# Altium PCB hat_template 2020V3.PcbDoc (part 2 of 2)
Units mm, origin at the board's own origin, x right, y up, seen from the top; angles counter-clockwise.
Board outline 64 x 85 mm, 4 copper layers (Top Side, Ground Plane, Power Plane, Bottom Side), stack 0.844 mm thick; 139 components, 78 nets, 419 pads, 123 vias.
Unrouted connection lines stored in the file: 3.
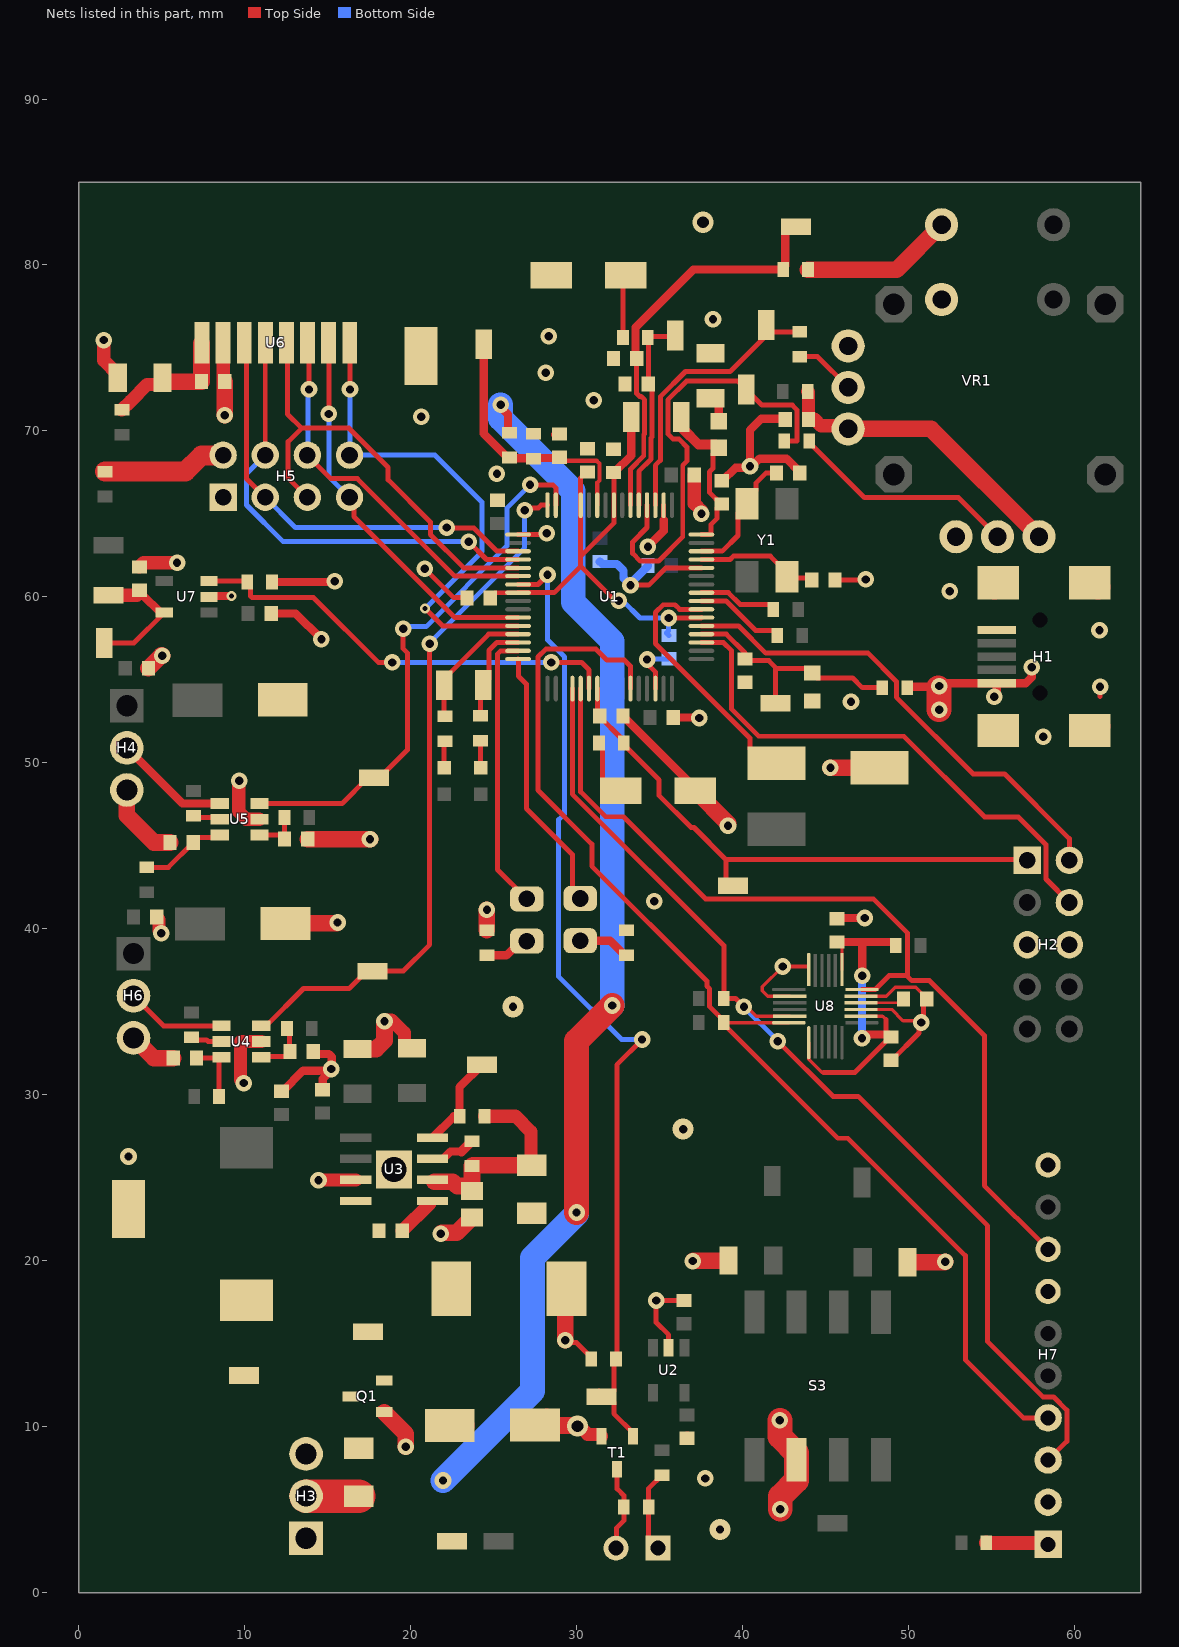
[diagram p4: the nets of this part, all layers, seen from the top]

## Via types
v1: diameter 1, hole 0.5, Top Side to Bottom Side, 103 vias
v2: diameter 1, hole 0.5, Top Side to Bottom Side, tented top, 9 vias
v3: diameter 1.27, hole 0.5, Top Side to Bottom Side, 3 vias
v4: diameter 1.27, hole 0.711, Top Side to Bottom Side, 2 vias
v5: diameter 0.6, hole 0.3, Top Side to Bottom Side, 2 vias
v6: diameter 0.6, hole 0.3, Top Side to Bottom Side, tented both sides, 1 vias
v7: diameter 1, hole 0.5, Top Side to Bottom Side, tented both sides, 1 vias
v8: diameter 1.3, hole 1.1, Top Side to Bottom Side, 1 vias
v9: diameter 2, hole 1.5, Top Side to Bottom Side, 1 vias

## Nets (pads, with @x,y where several pads share a name; then routed paths per layer and width w, separated by ;. In a path a pad name is that pad's centre, name@x,y a point inside that pad or via, vN(x,y) a via of type N, cw(c..) or ccw(c..) an arc to the next point about the centre after c; other vN are vias at no path point) (continued)
GND: BUCK_GND.1 C1.1 C2.1 C3.1 C4.1 C5.1 C6.2 C7.1 C8.2 C9.1 C10.2 C11.1 C12.2 C13.1 C15.2 C16.1 C18.1 C19.1 C20.1 C21.1 C22.1 C23.1 C24.1 C25.1 C26.1 C27.1 C28.1 C29.1 C30.1 C31.1 C32.1 C33.1 C34.1 C35.1 C36.2 C37.2 C38.1 C39.1 C40.1 C41.1 C42.1 C43.1 C44.1 C45.1 D1.1 GND_RADIO.1 GND_SAM4S.1 H1.5 H1.6 H1.7 H1.8 H1.9 H2.5 H2.6 H3.1 H3.3 H4.3 H5.1 H6.3 H7.2 H7.7 H7.10 Q1.1 R2.1 R7.1 R10.1 R11.1 R12.2 R13.2 R30.1 S1.1 S2.1 T1.2 U1.2 U1.17 U1.46 U1.60 U2.2 U3.7 U3.EPAD U4.2 U5.2 U6.2 U7.2 U8.9 U8.11 U8.18 U8.20 VR1.3 VR1.6 VR1.7 | length 154.9
  Top Side w0.2: v1(42.425,37.725) 41.2,36.5 41.2,36.25 41.515,35.935 U8.20@42.843,35.935 ; U8.9@47.143,35.135 48.986,35.135 49.671,34.45 v1@50.675,34.45 ; U8.11@47.143,35.935 48.657,35.935 49.196,36.475 50.45,36.475 51.1,35.825 C38.1@51.1,35.775
  Top Side w0.25: v1(42.425,37.725) 43.925,37.725 U8.18@43.95,37.7
  Top Side w0.3: C27.1@4.7,40.7 C27.1@4.841,40.559 ; v1@4.841,39.861 v1(4.975,39.727) ; U7.2@7.85,60 U7.2@7.9,60.05 ; C35.1@8.704,73.071 C35.1@8.8,72.975 ; v2@9.65,48.9 v2(9.675,48.925) ; v1(14.45,24.85) v1@14.465,24.865 ; v1@15.175,31.425 15.225,31.475 v1(15.225,31.55) ; v1@15.375,60.9 v1(15.425,60.95) ; v1@15.547,40.322 v1(15.6,40.375) ; v1(18.425,34.425) 18.425,34.375 v1@18.55,34.5 ; v1@20.625,70.875 v1(20.65,70.85) ; v1(20.851,61.703) 22.579,59.975 23.4,59.975 C10.2@23.4,59.925 ; v2(21.825,21.625) v2@21.875,21.675 ; U1.17@26.475,63.75 28.125,63.75 v2(28.2,63.825) ; v1@28.15,73.275 v1(28.15,73.513) ; v1(29.325,15.2) 29.459,15.066 29.984,15.066 30.875,14.175 R30.1@30.875,14.075 ; D1.1@29.325,18.225 D1.1@29.4,18.3 ; C6.2@32.175,68.9 C6.2@32.225,68.9 ; v1(33.252,60.703) 34.347,60.703 35.394,61.75 U1.60@37.525,61.75 ; v7(34.25,56.225) 34.25,55.986 34.75,55.486 U1.46@34.75,54.475 ; 35.25,64.49 U1.2@35.25,65.525 ; U2.2@35.55,14.75 35.55,15.525 34.8,16.275 v1(34.8,17.598) 34.802,17.6 C1.1@36.475,17.6 ; v1(37,19.975) v1@37.025,20 ; 37.142,65.572 37.142,65.575 ; v1@37.375,52.725 v1(37.4,52.7) ; v2(37.525,65) v2@37.525,65.189 ; v1(39.125,46.2) v1@39.125,46.35 ; C4.1@45.575,61.025 47.4,61.025 v1(47.425,61.05) ; C36.2@45.7,40.6 C36.2@45.725,40.575 ; C37.2@48.95,32.075 49,32.075 50.641,33.716 50.641,34.216 v1(50.775,34.35) ; v1@50.675,34.45 50.686,34.45 50.909,34.673 50.909,35.584 C38.1@51.1,35.775 ; v1(61.513,57.988) v1@61.55,58.025 ; 61.55,54 v1(61.55,54.575)
  Top Side w0.5: U7.2@7.9,60.05 v5(9.2,60.05) ; C26.1@11.6,59 13.075,59 v1(14.625,57.45) ; R11.1@11.65,60.9 v1@15.375,60.9 ; C23.1@12.225,30.2 12.275,30.2 13.525,31.45 14.475,31.45 14.479,31.454 15.146,31.454 15.175,31.425 14.7,30.95 C24.1@14.7,30.3 ; C28.1@14.125,32.6 14.271,32.454 15.071,32.454 15.25,32.275 15.25,31.575 v1(15.225,31.55) ; C25.1@28.7,69.79 28.725,69.765 C25.1@28.831,69.782 ; C43.1@32.8,52.825 37.15,48.475 S1.1@37.15,48.325 ; v1(34.3,63.025) 35.25,63.975 35.25,64.633 ; C9.1@35.975,52.725 v1@37.375,52.725 ; C15.2@38.75,67 38.8,67 39.579,67.779 40.354,67.779 v1(40.45,67.875) ; C20.1@42.575,70.7 42.55,70.725 41.125,70.725 40.45,70.05 v1(40.45,67.875) ; C3.1@43.45,67.475 43.45,67.525 42.65,68.325 41.035,68.325 40.585,67.875 v1(40.45,67.875) ; C36.2@45.725,40.575 45.8,40.65 v1(47.375,40.65)
  Top Side w0.75: v1(25.2,67.425) v1@25.212,67.413 ; C7.1@25.212,65.837 C7.1@25.225,65.825
  Top Side w0.8: v1(1.5,75.475) 1.5,74.25 2.35,73.4 C39.1@2.35,73.2 ; C34.1@3.65,61.8 3.9,62.05 v2(5.925,62.05) ; v1@4.841,39.861 C27.1@4.841,40.559 ; C35.1@8.704,73.071 U6.2@8.704,75.325 ; v2@9.65,48.9 9.65,47.05 10.1,46.6 U5.2@10.9,46.6 ; v2(9.95,30.7) 9.75,30.9 9.75,33.2 U4.2@11,33.2 ; v1@14.465,24.865 U3.7@16.689,24.865 ; v1@18.55,34.5 18.855,34.5 19.625,33.73 19.625,32.95 19.775,32.8 C18.1@20.075,32.8 ; C45.1@27.5,10.1 27.725,10.1 C45.1@28.213,10.588 ; v4(30.05,10.025) 30.177,10.025 30.677,9.525 31.4,9.525 T1.2@31.5,9.425 ; C33.1@36.65,9.3 C33.1@36.689,9.3 ; C13.1@37.1,67.35 37.1,65.617 37.142,65.575 ; 37.142,65.572 v2@37.525,65.189 ; R2.1@44.2,53.725 R2.1@44.219,53.706 ; v1@46.519,53.706 v1(46.537,53.688)
  Top Side w1: H4.3@2.9,48.36 2.9,46.825 4.525,45.2 C29.1@5.5,45.2 ; H6.3@3.3,33.42 4.52,32.2 C41.1@5.7,32.2 ; C22.1@4.2,55.7 4.98,56.48 4.998,56.48 v2(5.025,56.453) ; v1(8.8,70.95) C35.1@8.8,72.975 ; C2.1@12.461,40.322 v1@15.547,40.322 ; C40.1@13.8,45.4 v1(17.55,45.4) ; C19.1@16.8,32.75 17.925,32.75 18.425,33.25 v1@18.425,34.375 ; Q1.1@18.4,10.875 19.7,9.575 v1(19.7,8.788) ; v2@21.875,21.675 22.775,21.675 C16.1@23.7,22.6 ; R12.2@24.6,39.9 v1(24.6,41.15) ; C45.1@28.213,10.588 28.213,10.35 28.5,10.063 30.012,10.063 v4(30.05,10.025) ; v1(29.325,15.2) D1.1@29.325,18.225 ; v1@37.025,20 C32.1@39.15,20 ; S1.1@37.15,48.325 v1@39.125,46.35 ; R7.1@38.075,74.675 38.15,74.675 R7.1@38.225,74.75 ; v1(45.3,49.7) GND_SAM4S.1@48.25,49.7 ; C31.1@49.95,19.9 52.2,19.9 v1(52.225,19.925)
  Top Side w1.5: H1.8@55.175,51.7 H1.8@55.425,51.95 ; H1.6@55.175,60.6 H1.6@55.425,60.85 ; H1.9@60.925,51.95 61.175,51.95 H1.9@61.425,52.2 ; H1.7@60.925,60.85 61.175,60.85 H1.7@61.425,60.6
  Bottom Side w0.3: v1@4.925,39.675 4.925,39.677 v1(4.975,39.727) ; v2(5.025,56.453) v2@5.203,56.453 ; v7(34.25,56.225) 34.275,56.25 35.55,56.25 C12.2@35.575,56.275
  Bottom Side w0.5: C5.1@31.4,62.125 31.55,61.975 32.425,61.975 32.825,61.575 32.825,61.13 v1(33.252,60.703) 33.252,60.802 34.3,61.85 C11.1@34.3,61.9
  other v1: 37.75,6.875 3,26.275 34.675,41.65 58.125,51.575 52.498,60.34 31.029,71.842 28.325,75.7
  other v2: 38.225,76.725
  other v3: 38.65,3.8 36.425,27.925 26.175,35.3
  other v4: 37.625,82.575
  other v9: 19,25.5
IMU_INT: H7.8 U1.37 U8.12 | length 55.7
  Top Side w0.3: U1.37@30.25,54.475 30.25,48.251 31.751,46.75 32.825,46.75 37.775,41.8 47.881,41.8 49.95,39.731 49.95,37.222 49.903,37.175 ; U8.12@47.193,36.335 47.993,36.335 48.833,37.175 49.903,37.175 ; H7.8@58.417,20.684 54.578,24.522 54.578,33.571 51.274,36.875 50.203,36.875 49.903,37.175
LED_TAPE_3V3_A: TAPE_A.1 U1.16 U4.3 | length 42.2
  Top Side w0.3: U4.3@11,34.15 11.3,34.15 13.55,36.4 16.3,36.4 17.35,37.45 TAPE_A.1@17.7,37.45 19.561,37.45 21.15,39.039 v1(21.15,57.175) ; v1(26.875,65.225) 27.009,65.359 27.699,65.359 27.865,65.525 U1.16@28.25,65.525
  Bottom Side w0.3: v1(21.15,57.175) 21.15,57.24 26.875,62.965 v1(26.875,65.225)
LED_TAPE_3V3_B: TAPE_B.1 U1.15 U5.3 | length 32.9
  Top Side w0.3: U5.3@10.9,47.55 15.875,47.55 17.425,49.1 TAPE_B.1@17.8,49.1 18.125,49.1 19.8,50.775 19.8,56.627 19.55,56.877 v1(19.55,58.075) ; v1(27.2,66.75) 28.575,66.75 28.75,66.575 U1.15@28.75,65.525
  Bottom Side w0.3: v1(19.55,58.075) 19.684,58.209 20.934,58.209 25.8,63.075 25.8,65.35 v1(27.2,66.75)
LED_TAPE_5V_A: H6.2 U4.4 | length 6
  Top Side w0.3: H6.2@3.3,35.96 5.11,34.15 U4.4@8.6,34.15
LED_TAPE_5V_B: H4.2 U5.4 | length 7
  Top Side w0.5: H4.2@2.9,50.9 6.25,47.55 U5.4@8.5,47.55
MISO: H5.7 U1.27 U6.7 | length 23.6
  Top Side w0.3: U6.7@15.061,75.325 15.1,75.286 15.075,75.261 v1(15.075,71.025) ; H5.7@16.32,66 16.578,65.742 16.578,64.844 22.673,58.75 U1.27@26.475,58.75
  Bottom Side w0.3: v1(15.075,71.025) 15.075,67.245 H5.7@16.32,66
MOSI: H5.6 U1.22 U6.6 | length 22.7
  Top Side w0.3: H5.6@13.78,68.54 15.195,67.125 16.786,67.125 22.661,61.25 U1.22@26.475,61.25 ; U6.6@13.789,75.325 13.675,75.211 13.875,75.011 v1(13.875,72.5)
  Bottom Side w0.3: H5.6@13.78,68.54 13.827,68.587 13.827,72.453 v1(13.875,72.5)
Net3V3_RADIO_1: 3V3_RADIO.1 C34.2 L3.1 U7.5 | length 8.2
  Top Side w0.3: 3V3_RADIO.1@1.55,57.225 3.325,57.225 U7.5@5.15,59.05 ; C34.2@3.65,60.4 C34.2@3.7,60.4
  Top Side w0.5: C34.2@3.675,60.4 3.7,60.4 3.85,60.25 3.85,60.125 4.925,59.05 U7.5@5.15,59.05
  Top Side w0.8: L3.1@1.8,60.1 C34.2@3.5,60.1
Net5V_BUCK_RAW_1: 5V_BUCK_RAW.1 C17.2 D1.2 L2.1 U3.8 | length 0.2
  Top Side w0.8: L2.1@9.95,17.45 L2.1@10.1,17.6
NetBUZZER_1: BUZZER.1 R30.2 T1.1 U1.23 | length 60.1
  Top Side w0.3: U1.23@26.475,60.75 27.675,60.75 v1(28.25,61.325) ; BUZZER.1@31.35,12.15 31.35,11.8 BUZZER.1@31.5,11.8 ; R30.2@32.375,14.025 32.425,14.075 32.425,31.8 v1(33.95,33.325) ; R30.2@32.375,14.075 32.25,13.95 32.25,12.15 BUZZER.1@31.9,11.8 ; T1.1@33.4,9.425 33.4,9.625 32.25,10.775 32.25,11.45 BUZZER.1@31.9,11.8 ; BUZZER.1@31.5,11.8 BUZZER.1@31.9,11.8 ; BUZZER.1@31.5,11.8 BUZZER.1@31.9,11.8
  Bottom Side w0.3: v1(28.25,61.325) 28.25,57.406 29.275,56.381 29.275,46.923 28.925,46.573 28.925,37.115 32.715,33.325 v1(33.95,33.325)
NetC3_2: C3.2 U1.62 Y1.3 | length 7.7
  Top Side w0.3: U1.62@37.525,62.75 38.775,62.75 39.725,63.7 39.725,65.05 Y1.3@40.275,65.6 40.275,65.85 40.825,66.4 40.825,66.875 41.425,67.475 C3.2@42.05,67.475
NetC4_2: C4.2 U1.61 Y1.1 | length 7.5
  Top Side w0.3: U1.61@37.525,62.25 39.251,62.25 39.451,62.45 41.675,62.45 42.675,61.45 Y1.1@42.675,61.2 42.75,61.125 44.075,61.125 C4.2@44.175,61.025
NetC6_1: C6.1 C8.1 C10.1 C12.1 L1.2 U1.8 U1.12 U1.24 U1.54 | length 31.5
  Top Side w0.25: C10.1@24.8,59.925 24.8,59.975 25.075,60.25 U1.24@26.475,60.25
  Top Side w0.3: U1.24@26.475,60.25 27.675,60.25 28.65,60.25 30.25,61.85 ; C8.1@30.65,67.525 30.6,67.525 30.25,67.175 U1.12@30.25,65.525 30.25,62.444 ; C6.1@32.225,67.5 32.25,67.475 U1.8@32.25,65.525 32.25,64.444 30.25,62.444 ; v1(32.55,59.775) 32.325,59.775 30.25,61.85 ; v1(35.55,58.725) 35.562,58.738 37.513,58.738 U1.54@37.525,58.75 ; 30.25,61.85 30.25,62.444
  Top Side w0.5: C6.1@32.3,67.5 32.3,67.525 33.3,68.525 L1.2@33.3,70.85
  Bottom Side w0.3: v1(32.55,59.775) 32.775,59.775 33.825,58.725 v1(35.55,58.725) 35.55,57.95 35.425,57.825 C12.1@35.575,57.675
NetC14_1: C14.1 R7.2 | length 1.9
  Top Side w0.3: C14.1@38.575,70.575 C14.1@38.7,70.7
  Top Side w0.5: R7.2@38.075,71.975 38.275,71.975 38.575,71.675 38.575,70.7 C14.1@38.638,70.637
NetC14_2: C14.2 C15.1 L1.1 U1.64 | length 9.8
  Top Side w0.3: U1.64@37.525,63.75 38.088,63.75 38.113,63.775 38.113,64.375 38.45,64.713 38.45,65.35 C15.1@38.7,65.6 ; C14.2@38.375,68.775 38.225,68.625 38.225,67.749 38,67.524 38,66.3 C15.1@38.7,65.6 ; C15.1@38.75,65.6 C15.1@38.7,65.6
  Top Side w0.6: L1.1@36.3,70.85 36.3,70.225 36.425,70.1 36.43,70.1 37.355,69.175 38.375,69.175 C14.2@38.575,68.975
NetC16_2: C16.2 F2.2 R8.2 R29.2 U3.2 | length 13
  Top Side w0.3: U3.2@21.311,24.865 U3.2@21.415,24.761 ; C16.2@23.4,24.5 C16.2@23.7,24.2 ; R29.2@23.7,25.7 R29.2@23.75,25.75 ; F2.2@27.25,25.8 F2.2@27.3,25.75
  Top Side w0.8: R8.2@24.45,28.7 26.325,28.7 27.25,27.775 F2.2@27.25,25.8
  Top Side w1: U3.2@21.415,24.761 22.539,24.761 22.8,24.5 C16.2@23.4,24.5 ; C16.2@23.7,24.2 R29.2@23.7,25.7 ; R29.2@23.75,25.75 F2.2@27.3,25.75
NetC17_1: C17.1 U3.1 | length 2.6
  Top Side w0.3: U3.1@21.158,23.442 U3.1@21.311,23.595
  Top Side w0.8: C17.1@19.5,21.8 21.142,23.442 U3.1@21.158,23.442
NetC20_2: C20.2 R23.1 VR1.1 VR1.4 | length 18.5
  Top Side w0.8: R23.1@43.925,72.375 43.975,72.325 C20.2@43.975,70.7 44.344,70.7 44.728,70.316 VR1.4@46.179,70.316
  Top Side w1: VR1.4@46.179,70.316 VR1.4@46.37,70.125 51.37,70.125 VR1.1@57.87,63.625
NetC28_2: C28.2 R27.2 U4.1 | length 3.3
  Top Side w0.3: U4.1@11,32.25 11.05,32.3 12.475,32.3 12.725,32.55 C28.2@12.725,32.6 ; R27.2@12.55,34 12.7,33.85 C28.2@12.7,32.7
NetC29_2: C29.2 R16.1 U5.6 | length 5.2
  Top Side w0.3: R16.1@4.1,43.7 5.4,43.7 C29.2@6.9,45.2 6.9,45.25 7.15,45.5 8.35,45.5 U5.6@8.5,45.65
NetC35_2: C35.2 C39.2 R19.1 U6.1 | length 8.9
  Top Side w0.3: C39.2@4.65,72.8 C39.2@5.05,73.2 C39.2@5.275,72.975 ; U6.1@7.4,75.293 U6.1@7.432,75.325 U6.1@7.432,74.525
  Top Side w0.8: R19.1@2.6,71.275 3.125,71.8 3.128,71.8 4.128,72.8 C39.2@4.65,72.8
  Top Side w1: C39.2@5.275,72.975 C35.2@7.4,72.975 7.4,74.525 U6.1@7.4,75.293
NetC36_1: C36.1 C37.1 R17.1 U8.1 U8.8 U8.13 | length 22.4
  Top Side w0.2: U8.1@43.993,33.135 43.993,32.132 44.774,31.35 44.875,31.35 ; C36.1@45.7,39.2 45.993,38.907 U8.13@45.993,37.535 ; U8.8@47.143,34.735 48.44,34.735 48.65,34.525
  Top Side w0.3: 44.875,31.35 46.775,31.35 C37.1@48.8,33.375 ; v1(47.2,33.4) v1@47.425,33.625 ; C37.1@48.65,33.725 48.65,34.525
  Top Side w0.5: C36.1@45.7,39.2 47.175,39.2 ; v1(47.225,37.175) 47.225,39.15 47.175,39.2 ; v1@47.425,33.625 C37.1@48.675,33.625 ; C37.1@48.8,33.625 C37.1@48.95,33.475 ; R17.1@49.225,39 49.225,39.1 49.125,39.2 48.125,39.2 47.175,39.2
  Bottom Side w0.3: v1@47.2,37.15 v1(47.225,37.175)
  Bottom Side w0.5: v1(47.2,33.4) v1@47.2,37.15
NetC38_2: C38.2 U8.10 | length 2.7
  Top Side w0.15: U8.10@47.143,35.535 49.46,35.535 C38.2@49.7,35.775
NetC40_2: C40.2 R15.2 U5.1 | length 2.9
  Top Side w0.3: U5.1@10.9,45.65 12.15,45.65 C40.2@12.4,45.4 R15.2@12.4,46.7
NetC41_2: C41.2 R28.1 U4.6 | length 3.8
  Top Side w0.3: C41.2@7.1,32.2 8.55,32.2 8.45,32.1 R28.1@8.45,29.9
NetC42_2: C42.2 JOY_SEL.1 R26.1 U1.6 | length 24.8
  Top Side w0.3: U1.6@33.25,65.525 33.25,67.697 34.05,68.497 34.05,69.776 34.1,69.826 34.1,71.874 33.899,72.075 33.801,72.075 33.625,72.251 C42.2@33.625,74.375 ; R26.1@42.45,79.725 R26.1@42.45,79.825
  Top Side w0.5: C42.2@33.625,74.375 33.55,74.45 33.55,76.241 37.034,79.725 42.35,79.725 42.575,79.95 42.575,82.05 JOY_SEL.1@43.025,82.5
NetDL1_1: DL1.1 R6.2 | length 1.6
  Top Side w0.3: R6.2@24.2,51.325 24.225,51.3 DL1.1@24.225,49.7
NetDL2_1: DL2.1 R5.2 | length 1.6
  Top Side w0.3: DL2.1@22.025,49.7 22.025,51.25 R5.2@22.075,51.3
NetERASE_1: ERASE.1 U1.55 | length 15.6
  Top Side w0.3: U1.55@37.525,59.25 36.209,59.25 35.934,59.525 35.219,59.525 34.75,59.056 34.75,57.189 40.45,51.489 40.45,50.825 41.3,49.975 ERASE.1@42.05,49.975
NetF1_1: F1.1 H3.2 | length 3.2
  Top Side w2: H3.2@13.7,5.81 13.706,5.804 16.871,5.804 F1.1@16.875,5.8
NetH5_2: H5.2 R34.1 | length 7.5
  Top Side w0.6: H5.2@8.685,68.525 H5.2@8.7,68.54
  Top Side w1.2: R34.1@1.575,67.55 6.425,67.55 7.4,68.525 H5.2@8.685,68.525
NetH7_1: H7.1 R35.1 | length 3.8
  Top Side w0.87: R35.1@54.7,3 54.715,2.985 58.335,2.985 H7.1@58.417,2.904
NetH8_1: H8.1 R20.2 R31.2 | length 5.1
  Top Side w0.3: R20.2@34.416,5.099 R20.2@34.35,5.165 ; H8.1@34.915,2.675 34.35,3.24 R20.2@34.35,5.15 R20.2@34.35,5.165 ; R31.2@35.15,7.075 34.35,6.275 R20.2@34.35,5.165
NetH8_2: H8.2 R20.1 T1.3 | length 5
  Top Side w0.3: H8.2@32.375,2.837 32.4,2.862 32.4,3.875 32.85,4.325 R20.1@32.85,5.15 32.85,5.85 32.45,6.25 T1.3@32.45,7.425
NetJ1_1: J1.1 U1.31 | length 16.8
  Top Side w0.3: U1.31@26.475,56.75 25.425,56.75 25.225,56.55 25.225,43.575 J1.1@27,41.8
NetJ1_2: J1.2 R12.1 | length 2.8
  Top Side w0.3: J1.2@26.628,39.256 J1.2@27,39.256
  Top Side w0.5: R12.1@24.6,38.4 25.772,38.4 J1.2@26.628,39.256
NetJ2_1: J2.1 U1.32 | length 16
  Top Side w0.3: U1.32@26.475,56.25 26.5,56.225 26.5,55.225 26.975,54.75 26.975,47.25 29.75,44.475 29.75,42.3 J2.1@30.225,41.825
NetJ2_2: J2.2 R13.1 | length 3.2
  Top Side w0.3: R13.1@32.95,38.35 R13.1@33,38.4
  Top Side w0.5: J2.2@30.225,39.281 32.019,39.281 R13.1@32.95,38.35
NetJOYSTICK1_1: JOYSTICK1.1 R24.1 U1.4 | length 27.8
  Top Side w0.3: U1.4@34.25,65.525 34.25,64.181 33.377,63.308 33.377,62.622 33.845,62.153 34.939,62.153 36.4,63.614 36.4,67.924 36.65,68.174 36.65,69.031 36.181,69.5 35.826,69.5 35.5,69.826 35.5,71.874 36.626,73 39.725,73 JOYSTICK1.1@40.225,72.5 41.176,71.549 43.001,71.549 43.275,71.274 43.275,69.4 R24.1@42.525,69.4 R24.1@42.525,69.5
NetJOYSTICK2_1: JOYSTICK2.1 R25.2 U1.3 | length 17.2
  Top Side w0.3: U1.3@34.75,65.525 34.75,67.924 35.05,68.224 35.05,72.061 36.57,73.58 39.255,73.58 41.237,75.563 41.237,75.788 JOYSTICK2.1@41.425,75.975 ; JOYSTICK2.1@41.425,76.375 41.425,76.1 JOYSTICK2.1@41.425,75.975 ; R25.2@43.45,75.975 JOYSTICK2.1@41.425,75.975
NetPGOOD_1: PGOOD.1 R8.1 U3.4 | length 5.8
  Top Side w0.5: U3.4@21.311,27.405 22.606,28.7 R8.1@22.95,28.7 22.95,30.45 PGOOD.1@24.3,31.8
NetR3_2: R3.2 U1.57 | length 4.8
  Top Side w0.2: R3.2@41.825,59.225 R3.2@41.85,59.25
  Top Side w0.3: U1.57@37.525,60.25 39.151,60.25 39.851,59.55 41.65,59.55 41.838,59.362 R3.2@41.838,59.237
NetR4_2: R4.2 U1.56 | length 5.5
  Top Side w0.3: U1.56@37.525,59.75 39.014,59.75 40.789,57.975 41.9,57.975 42.1,57.775 R4.2@42.1,57.675
NetR11_2: R11.2 U1.38 U7.3 | length 26.8
  Top Side w0.3: U7.3@7.85,60.95 10.1,60.95 R11.2@10.15,60.9 10.35,60.7 10.35,60.05 10.45,59.95 14.15,59.95 18.05,56.05 v1(18.9,56.05) ; v1(28.475,56.05) 30.3,56.05 30.75,55.6 U1.38@30.75,54.475
  Bottom Side w0.3: v1@18.675,56.05 v1(18.9,56.05) v1(28.475,56.05)
NetR14_2: R14.2 S1.2 | length 3.6
  Top Side w0.3: R14.2@31.35,51.2 31.55,51 31.55,49.061 32.286,48.325 S1.2@32.65,48.325
NetR18_2: R18.2 S2.2 | length 3.8
  Top Side w0.3: R18.2@32.8,75.625 32.8,79.2 S2.2@32.975,79.375
NetR24_2: R24.2 VR1.2 | length 13.8
  Top Side w0.3: R24.2@44.025,69.4 44.025,69.3 47.35,65.975 53.02,65.975 VR1.2@55.37,63.625
NetR25_1: R25.1 VR1.5 | length 3.7
  Top Side w0.3: R25.1@43.45,74.475 44.52,74.475 VR1.5@46.37,72.625
NetR26_2: R26.2 VR1.8 | length 9.2
  Top Side w1: R26.2@43.95,79.725 49.3,79.725 VR1.8@52,82.425
NetR29_1: R29.1 U3.3 | length 2.8
  Top Side w0.3: U3.3@21.311,26.135 U3.3@21.96,26.135
  Top Side w0.5: U3.3@21.96,26.135 22.4,26.575 23.075,26.575
  Top Side w0.6: 23.075,26.575 R29.1@23.7,27.2
NetR32_1: R32.1 U4.5 | length 1.9
  Top Side w0.3: R32.1@6.8,33.45 6.95,33.3 7.7,33.3 7.8,33.2 U4.5@8.6,33.2
NetR33_1: R33.1 U5.5 | length 1.7
  Top Side w0.3: R33.1@6.925,46.8 7.025,46.7 8.4,46.7 U5.5@8.5,46.6
nRST: C43.2 H2.1 nRST.1 R14.1 U1.39 | length 33.6
  Top Side w0.3: U1.39@31.25,54.475 31.25,52.975 C43.2@31.4,52.825 31.438,52.787 31.438,52.737 32.65,51.525 32.65,51.4 R14.1@32.85,51.2 32.85,51.1 34.981,48.969 34.981,48.02 36.903,46.097 37.078,46.097 39,44.175 ; nRST.1@39.425,42.6 39.35,42.6 39,42.95 39,44.175 ; H2.1@57.16,44.12 57.105,44.175 39,44.175
RADIO_CE: H5.3 U1.19 U6.3 | length 26.4
  Top Side w0.3: U6.3@9.975,75.325 10.115,75.185 10.115,67.125 H5.3@11.24,66 ; v1(22.175,64.175) 22.2,64.15 23.806,64.15 25.206,62.75 U1.19@26.475,62.75
  Bottom Side w0.3: H5.3@11.24,66 13.065,64.175 v1(22.175,64.175)
RADIO_CSN: H5.4 U1.20 U6.4 | length 28
  Top Side w0.3: H5.4@11.24,68.54 11.24,75.319 U6.4@11.246,75.325 ; v1(23.5,63.325) 24.575,62.25 U1.20@26.475,62.25
  Bottom Side w0.3: H5.4@11.24,68.54 10.115,67.415 10.115,65.534 12.324,63.325 v1(23.5,63.325)
RADIO_IRQ: H5.8 U1.28 U6.8 | length 29.8
  Top Side w0.3: U6.8@16.332,75.325 16.35,75.307 v1(16.35,72.5) ; v5(20.875,59.3) 21.925,58.25 U1.28@26.475,58.25
  Bottom Side w0.3: v1(16.35,72.5) 16.335,72.485 16.335,68.555 H5.8@16.32,68.54 21.466,68.54 24.3,65.706 24.3,62.725 v5(20.875,59.3)
SCK: H5.5 U1.21 U6.5 | length 27.9
  Top Side w0.3: U6.5@12.518,75.325 12.575,75.268 12.575,71.025 13.438,70.162 ; H5.5@13.78,66 12.625,67.155 12.625,69.349 13.438,70.162 ; U1.21@26.475,61.75 23.2,61.75 21.2,63.75 21.2,64.501 18.65,67.051 18.65,67.801 16.289,70.162 13.438,70.162
SLEEP/WKUP: C44.2 R18.1 SLEEP.1 U1.5 | length 12.2
  Top Side w0.3: U1.5@33.75,65.525 33.75,67.561 34.5,68.311 34.5,69.589 34.55,69.639 34.55,72.6 C44.2@34.325,72.825 34.313,72.837 34.325,72.85 34.325,75.6 R18.1@34.3,75.625 34.375,75.7 35.9,75.7 SLEEP.1@35.95,75.75
STATUS0: R6.1 STATUS0.1 U1.30 | length 6.1
  Top Side w0.3: R6.1@24.2,52.825 24.2,54.525 STATUS0.1@24.375,54.7 24.725,55.05 24.725,56.775 25.2,57.25 U1.30@26.475,57.25
STATUS1: R5.1 STATUS1.1 U1.29 | length 7.9
  Top Side w0.3: R5.1@22.075,52.8 22.025,52.85 STATUS1.1@22.025,54.675 22.025,55.075 24.7,57.75 U1.29@26.475,57.75
SWCLK: H2.2 U1.53 | length 29.3
  Top Side w0.3: U1.53@37.525,58.25 39.764,58.25 41.408,56.606 47.569,56.606 49.275,54.899 49.275,53.951 53.891,49.335 55.79,49.335 59.7,45.425 H2.2@59.7,44.12
SWDIO: H2.4 U1.51 | length 31.9
  Top Side w0.3: U1.51@37.525,57.25 38.85,57.25 39.325,56.775 39.325,53.25 39.475,53.1 40.975,51.6 49.725,51.6 54.59,46.735 56.62,46.735 58.285,45.069 58.285,42.995 H2.4@59.7,41.58
TWCK0: H7.3 R22.1 U1.36 U8.23 | length 64
  Top Side w0.2: v1(40.086,35.3) 40.257,35.3 40.822,34.735 U8.23@42.843,34.735
  Top Side w0.3: U1.36@29.75,54.475 29.75,48.114 38.875,38.989 R22.1@38.875,35.8 39.586,35.8 v1(40.086,35.3) ; v1(42.125,33.225) 45.45,29.9 46.975,29.9 54.775,22.1 54.775,15.114 58.095,11.794 58.738,11.794 59.542,10.99 59.542,9.109 H7.3@58.417,7.984
  Bottom Side w0.3: v1(40.086,35.3) 40.086,35.282 42.125,33.243 v1(42.125,33.225)
TWD0: H7.4 R21.1 U1.43 U8.24 | length 71.3
  Top Side w0.2: R21.1@38.875,34.335 U8.24@42.793,34.335 ; R21.1@38.875,34.35 R21.1@38.91,34.385
  Top Side w0.3: U1.43@33.25,54.475 33.25,55.825 32.875,56.2 31.825,56.2 31.175,56.85 28.144,56.85 27.675,56.381 27.675,48.35 30.925,45.1 30.925,43.775 37.849,36.851 37.849,36.55 38.025,36.374 38.025,35.3 38.875,34.45 R21.1@38.875,34.35 ; R21.1@38.875,34.275 38.875,34.25 45.75,27.375 46.35,27.375 53.425,20.299 53.425,14.025 56.926,10.524 H7.4@58.417,10.524
USB_DETECT: C30.2 R1.1 R2.2 U1.52 USB_DETECT.1 | length 14.6
  Top Side w0.3: U1.52@37.525,57.75 39.025,57.75 40.15,56.625 C30.2@40.15,56.25 40.244,56.156 41.583,56.156 42.064,55.675 ; USB_DETECT.1@42,53.6 42,55.611 42.064,55.675 ; R1.1@48.425,54.525 47.225,54.525 46.625,55.125 44.5,55.125 R2.2@44.2,55.425 43.95,55.675 42.064,55.675
VBAT: C45.2 F2.1 Q1.2 VBAT.1 | length 1
  Top Side w0.3: VBAT.1@17.425,15.725 VBAT.1@17.45,15.7
  Top Side w1.5: C45.2@21.855,10.067 C45.2@22.355,10.067
  Top Side w2: C45.2@22.355,10.067 C45.2@22.855,10.067
VBAT_RAW: F1.2 Q1.3 R9.2 VBAT_RAW.1 | length 73.7
  Top Side w0.5: v1(25.425,71.575) 25.425,71.44 25.865,71 25.865,69.985 R9.2@25.95,69.9
  Top Side w1.5: v1(30,22.9) 30,33.225 v1(32.15,35.375)
  Bottom Side w1.5: v1(21.95,6.75) 27.35,12.15 27.35,20.175 30,22.825 v1(30,22.9) ; v1(25.425,71.575) 25.425,70.75 29.802,66.373 29.802,59.673 32.15,57.325 v1(32.15,35.375)
VBAT_REF: C25.2 R9.1 R10.2 U1.10 VBAT_REF.1 | length 15.8
  Top Side w0.25: C25.2@28.973,68.413 29.186,68.2 31.214,68.2 31.375,68.039 31.375,67.011 31.25,66.886 U1.10@31.25,65.525
  Top Side w0.5: VBAT_REF.1@24.4,75.225 24.4,69.85 R9.1@25.85,68.4 ; R9.1@25.95,68.4 R9.1@25.85,68.4 ; C25.2@28.973,68.413 28.926,68.366 27.447,68.366 R10.2@27.4,68.319 27.36,68.36 25.89,68.36 R9.1@25.85,68.4
VBUS: H1.1 R1.2 S3.2 | length 16.8
  Top Side w0.3: R1.2@49.925,54.525 R1.2@49.95,54.55
  Top Side w0.5: R1.2@49.95,54.55 49.975,54.575 51.8,54.575 v1(51.85,54.625) 52.025,54.8 H1.1@55.325,54.8 ; v1(55.175,53.975) 55.325,54.125 H1.1@55.325,54.8 ; v1(57.425,55.75) 57.425,55.15 57.075,54.8 H1.1@55.325,54.8
  Top Side w1.5: v1(42.25,10.375) 42.25,9.41 43.26,8.4 S3.2@43.26,8 43.26,6.76 42.275,5.775 v1(42.275,5.025) ; v1@51.8,54.509 51.85,54.459 v1(51.85,53.2)
pads on no net: H1.4 H1.MH1 H1.MH2 H2.3 H2.9 H2.10 H7.5 H7.6 U1.9 U1.11 U1.13 U1.14 U1.25 U1.26 U1.33 U1.34 U1.35 U1.40 U1.41 U1.42 U1.44 U1.47 U1.48 U1.49 U1.50 U1.59 U1.63 U2.4 U3.6 U7.4 U8.2 U8.3 U8.4 U8.5 U8.6 U8.7 U8.14 U8.15 U8.16 U8.17 U8.19 U8.21 VR1.9 VR1.10 VR1.11 VR1.12 VR1.13 VR1.14 Y1.2 Y1.4
copper on no net:
  other v8: 44.993,35.335

## Polygon pours and split planes (outlines as drawn)
GND on Top Side "Top Side-GND" (solid, remove dead copper, pour order 38): -0.157,76.75 -0.145,76.737 -0.145,-0.238 63.73,-0.238 63.805,-0.313 63.83,-0.288 63.83,84.762 21.53,84.762 21.53,76.762
GND on Top Side "Top Side-GND 1" (solid, pour order 36): 63.475,62.65 52.125,62.65 49.925,60.45 49.925,57.5 53.85,57.5 53.85,53.775 52.35,52.275 52.35,50.3 53.15,49.5 63.475,49.5
GND on Top Side "Top Side-GND 2" (solid, pour order 34): 32.15,76.925 30.3,78.775 30.3,80.9 27.042,80.9 26.55,80.31 26.55,79.875 26.55,76.925 26.55,69.1 27.254,68.396 33.429,68.396 33.429,72.821 33.629,73.021 33.304,73.346 33.304,76.925
5V on Top Side "Top Side-5V" (solid, pour order 32): 15.4,44.4 15.547,44.253 15.547,39.722 12.1,36.275 1.675,36.275 1.675,44.275 2.8,45.4 14.425,45.4 14.425,45.325 15.375,44.375
5V on Top Side "Top Side-5V 1" (solid, pour order 30): 14.625,57.45 13.075,59 11.6,59 11.1,59.5 5.175,59.5 -0.075,54.25 -0.075,50.65 9.15,50.65 14.625,56.125
3V3_REG on Top Side "Top Side-3V3_REG" (solid, pour order 26): 35.425,13.475 35.45,13.45 35.45,9.825 38.5,9.825 39.55,10.875 42.766,10.875 44.075,9.566 44.075,3.35 44.7,2.725 46.875,2.725 47.3,3.15 47.3,10.875 44.7,13.475
3V3 on Top Side "Top Side-3V3" (solid, pour order 18): 44.375,14.975 44.4,15 50.975,15 50.975,25.375 49.45,26.775 48.975,26.775 43.575,26.775 44.375,25.975
5V on Top Side "Top Side-5V 2" (solid, pour order 16): 40.175,26.775 33.625,20.225 33.625,13.8 33.975,13.45 39.275,13.45 39.275,14.925 39.325,14.975 44.375,14.975 44.375,25.975 44.35,25.975 43.55,26.775
5V_BUCK on Top Side "Top Side-5V_BUCK" (solid, pour order 12): 21.5,28.55 19.489,26.539 15.599,26.539 15.599,26.249 11.575,22.225 7.125,22.225 7.125,29.725 14.25,29.725 15.75,31.225 21.5,31.225
VBAT_RAW on Top Side "Top Side-VBAT_RAW" (solid, pour order 4): 15.625,13.725 15.79,13.725 18.072,11.443 18.072,9.503 20.025,7.55 23.25,7.55 23.9,6.9 23.9,0 18.7,0 17.8,0.9 17.925,1.025 17.925,6.625 17.325,7.225 14.25,7.225 14.25,12.35
Net5V_BUCK_RAW_1 on Top Side "Top Side-Net5V_BUCK_RAW_1" (solid, pour order 2): 23.575,21.548 23.5,21.473 23.5,18.45 21.625,18.45 20.175,17 16,17 16,14.4 16.125,14.275 15.575,13.725 13.55,11.6 8.325,11.625 7.125,11.625 7.125,16.125 7.125,22.05 11.4,22.05 13.225,23.875 19,23.875 19,21.15 23.375,21.225
VBAT on Top Side "Top Side-VBAT" (solid, pour order 0): 25.125,24.725 25.45,25.05 29.375,25.05 29.375,23.075 26.725,20.425 26.725,11.85 22.825,7.95 22.825,7.375 22.25,7.375 15.725,13.9 15.725,16.325 17.25,17.85 21.025,17.85 21.1,17.775 21.1,16.5 23.5,16.5 23.775,16.775 23.575,16.975 23.575,23.2 25.125,24.75
GND on Bottom Side "Bottom Side-GND" (solid, remove dead copper, pour order 40): 21.7,85.025 21.7,77.025 21.725,77 -0.025,77 -0.025,0.05 0.025,0 64.025,0 64.025,84.95 63.975,85
3V3_PROG on Bottom Side "Bottom Side-3V3_PROG" (solid, pour order 28): 61.099,37.875 55.5,37.875 55.75,37.625 55.75,34.525 54.775,33.55 54.775,15.275 44.2,4.7 44.2,1.55 53.1,1.55 61.225,9.675
VBUS on Bottom Side "Bottom Side-VBUS" (solid, pour order 24): 55.75,51.325 58.625,54.2 58.625,57.475 50.35,57.475 40.3,47.425 40.3,3.85 43.275,3.85 54.775,15.35 54.775,33.55 55.75,34.525
GND on Ground Plane (split plane): 63.49,0.51 0.51,0.51 0.51,76.95 21.7,76.95 21.65,77 21.65,84.49 63.49,84.49
5V_BUCK on Power Plane (split plane): 31.146,23.621 31.146,12.475 31.155,12.425 31.183,12.383 32.833,10.733 32.875,10.705 32.925,10.696 40.271,10.696 41.571,9.396 41.571,6.729 40.921,6.079 39.95,6.079 39.9,6.07 39.858,6.042 37.783,3.967 37.755,3.925 37.746,3.875 37.746,0.51 0.51,0.51 0.51,28.971 25.796,28.971
3V3 on Power Plane (split plane): 63.49,0.51 38.004,0.51 38.004,3.821 40.004,5.821 40.975,5.821 41.025,5.83 41.067,5.858 41.792,6.583 41.82,6.625 41.829,6.675 41.829,9.45 41.82,9.5 41.792,9.542 40.454,10.879 40.454,10.901 44.492,14.938 44.52,14.98 44.529,15.029 44.529,25.95 44.52,26 44.492,26.042 38.842,31.692 38.8,31.72 38.75,31.729 32.354,31.729 28.667,35.417 28.625,35.445 28.575,35.454 18.554,35.454 18.179,35.829 18.179,57.75 18.17,57.8 18.142,57.842 14.263,61.721 21.7,61.721 21.75,61.73 21.792,61.758 21.82,61.8 21.829,61.85 21.829,76.075 21.829,84.49 63.49,84.49
3V3_RADIO on Power Plane (split plane): 21.571,76.075 21.571,61.979 7.2,61.979 7.15,61.97 7.108,61.942 3.521,58.354 0.51,58.354 0.51,76.896 21.571,76.896
5V on Power Plane (split plane): 17.921,57.696 17.921,35.775 17.921,35.7 17.93,35.65 17.958,35.608 18.333,35.233 18.375,35.205 18.425,35.196 28.521,35.196 32.208,31.508 32.25,31.48 32.3,31.471 38.696,31.471 44.271,25.896 44.271,15.083 40.36,11.173 40.325,11.179 32.937,11.179 31.534,12.582 31.534,23.729 31.524,23.778 31.496,23.82 25.995,29.321 25.953,29.349 25.904,29.359 0.51,29.359 0.51,58.096 3.575,58.096 3.625,58.105 3.667,58.133 7.254,61.721 13.896,61.721

## Other copper
Top Side:
  pour cut-out: 21.7,85.025 21.7,77.025 0.025,77.025 0,77 -0.05,77.05 -0.05,85.025
  pour cut-out: 37.054,13.971 37.054,15.529 37.071,15.546 37.174,15.546 37.174,14.091 37.174,15.546 37.071,15.546 37.179,15.546 37.179,14.096 37.054,13.971 37.054,15.529 37.157,15.529 37.174,15.546 37.175,15.545 37.175,14.2
  pour cut-out: 37.054,14.877
Bottom Side:
  pour cut-out: 23.15,88.425
Ground Plane (plane layer: these items are gaps in the copper):
  region: 13.725,81.275
  pour cut-out: -0.075,84.925 -0.075,76.95 21.7,76.95 21.65,77 21.65,85.05 0.05,85.05
Power Plane (plane layer: these items are gaps in the copper):
  pour cut-out: 0,85 0,77.025 21.7,77.025 21.7,85
  lines w0.254: -0.025,77.025 20.75,77.025 21.7,77.025 ; 0,29.1 25.85,29.1 31.275,23.675 31.275,12.475 32.925,10.825 40.325,10.825 ; 37.875,0.375 37.875,3.875 39.95,5.95 40.975,5.95 41.7,6.675 41.7,9.45 ; 41.525,0.15 41.675,0 0,0 ; 41.7,0.025 41.725,0 64,0 64,85 21.7,85 21.7,76.075 21.7,61.85 ; 0,0 0,0 ; 0,58.225 0,58.225 ; 0,58.225 3.575,58.225 ; 0,58.225 0,29.359 0.129,29.229 25.904,29.229 31.404,23.729 31.404,12.529 32.883,11.05 40.325,11.05 40.325,10.825 ; 0,58.225 3.575,58.225 ; 3.575,58.225 7.2,61.85 ; 3.575,58.225 7.2,61.85 ; 7.2,61.85 21.7,61.85 ; 7.2,61.85 13.95,61.85 ; 13.95,61.85 21.7,61.85 ; 13.95,61.85 18.05,57.75 ; 13.95,61.85 18.05,57.75 ; 18.05,57.75 18.05,35.7 18.425,35.325 28.575,35.325 ; 18.05,57.75 18.05,35.775 18.5,35.325 28.575,35.325 ; 28.575,35.325 32.3,31.6 ; 28.575,35.325 32.3,31.6 ; 32.3,31.6 38.75,31.6 ; 32.3,31.6 38.75,31.6 ; 38.75,31.6 44.4,25.95 ; 38.75,31.6 44.4,25.95 ; 40.325,10.825 41.7,9.45 ; 40.325,10.825 41.7,9.45 ; 44.4,15.029 44.4,25.95 ; 44.4,15.029 40.325,10.954 44.4,15.029 ; 44.4,15.029 44.4,25.95

## Silkscreen, mask and mechanical layers (free items; w line width, h text height)
Top Overlay:
  lines w0.254: 44.87,64.525 44.87,66.55 ; 44.87,68.505 44.87,79.425
  text "Group 19" at 18.35,82.3 h1.52
  text "-" at 15.675,10.8 h1.52 r180
  text "+" at 18.375,4.975 h1.52
  text "-" at 16.125,2.175 h1.52 r180
Board Outline:
  lines w0.254: -0.2,0 64,0 64,85 -0.2,85 -0.2,0

## Dimensions
64,86 to 0,86 on Mechanical 1
65,85 to 65,0 on Mechanical 1

## Text inside footprints (layer, text, board x,y; h text height)
H1: Mechanical 1 "PCB Edge" at 63.607,52.364 h0.25 r90
H2: Top Overlay "2" at 58.95,46.32 h1.5 r270; Top Overlay "1" at 56.41,45.82 h1.5 r270; Top Overlay "10" at 58.95,32.76 h1.5 r270; Top Overlay "9" at 56.41,32.76 h1.5 r270
H5: Top Overlay "7" at 17.68,65.27 h1.5; Top Overlay "8" at 17.68,67.77 h1.5; Top Overlay "1" at 7,65.25 h1.5; Top Overlay "2" at 6.5,67.79 h1.5
H7: Top Overlay "1" at 62.862,3.539 h1.52 r180
S3: Top Overlay "4" at 46.795,7.325 h0.8; Top Overlay "3" at 44.32,7.3 h0.8; Top Overlay "2" at 41.72,7.35 h0.8; Top Overlay "1" at 39.12,7.25 h0.8; Top Overlay "ON" at 37.672,16.128 h1
U3: Mechanical 13 "*" at 20.93,24.344 h1.27 r180